# Altium PCB Mach trai tim.PcbDoc
Units mm, origin at the board's own origin, x right, y up, seen from the top; angles counter-clockwise.
Board outline 100 x 100 mm, 2 copper layers (Top Layer, Bottom Layer); 19 components, 17 nets, 59 pads, 0 vias.
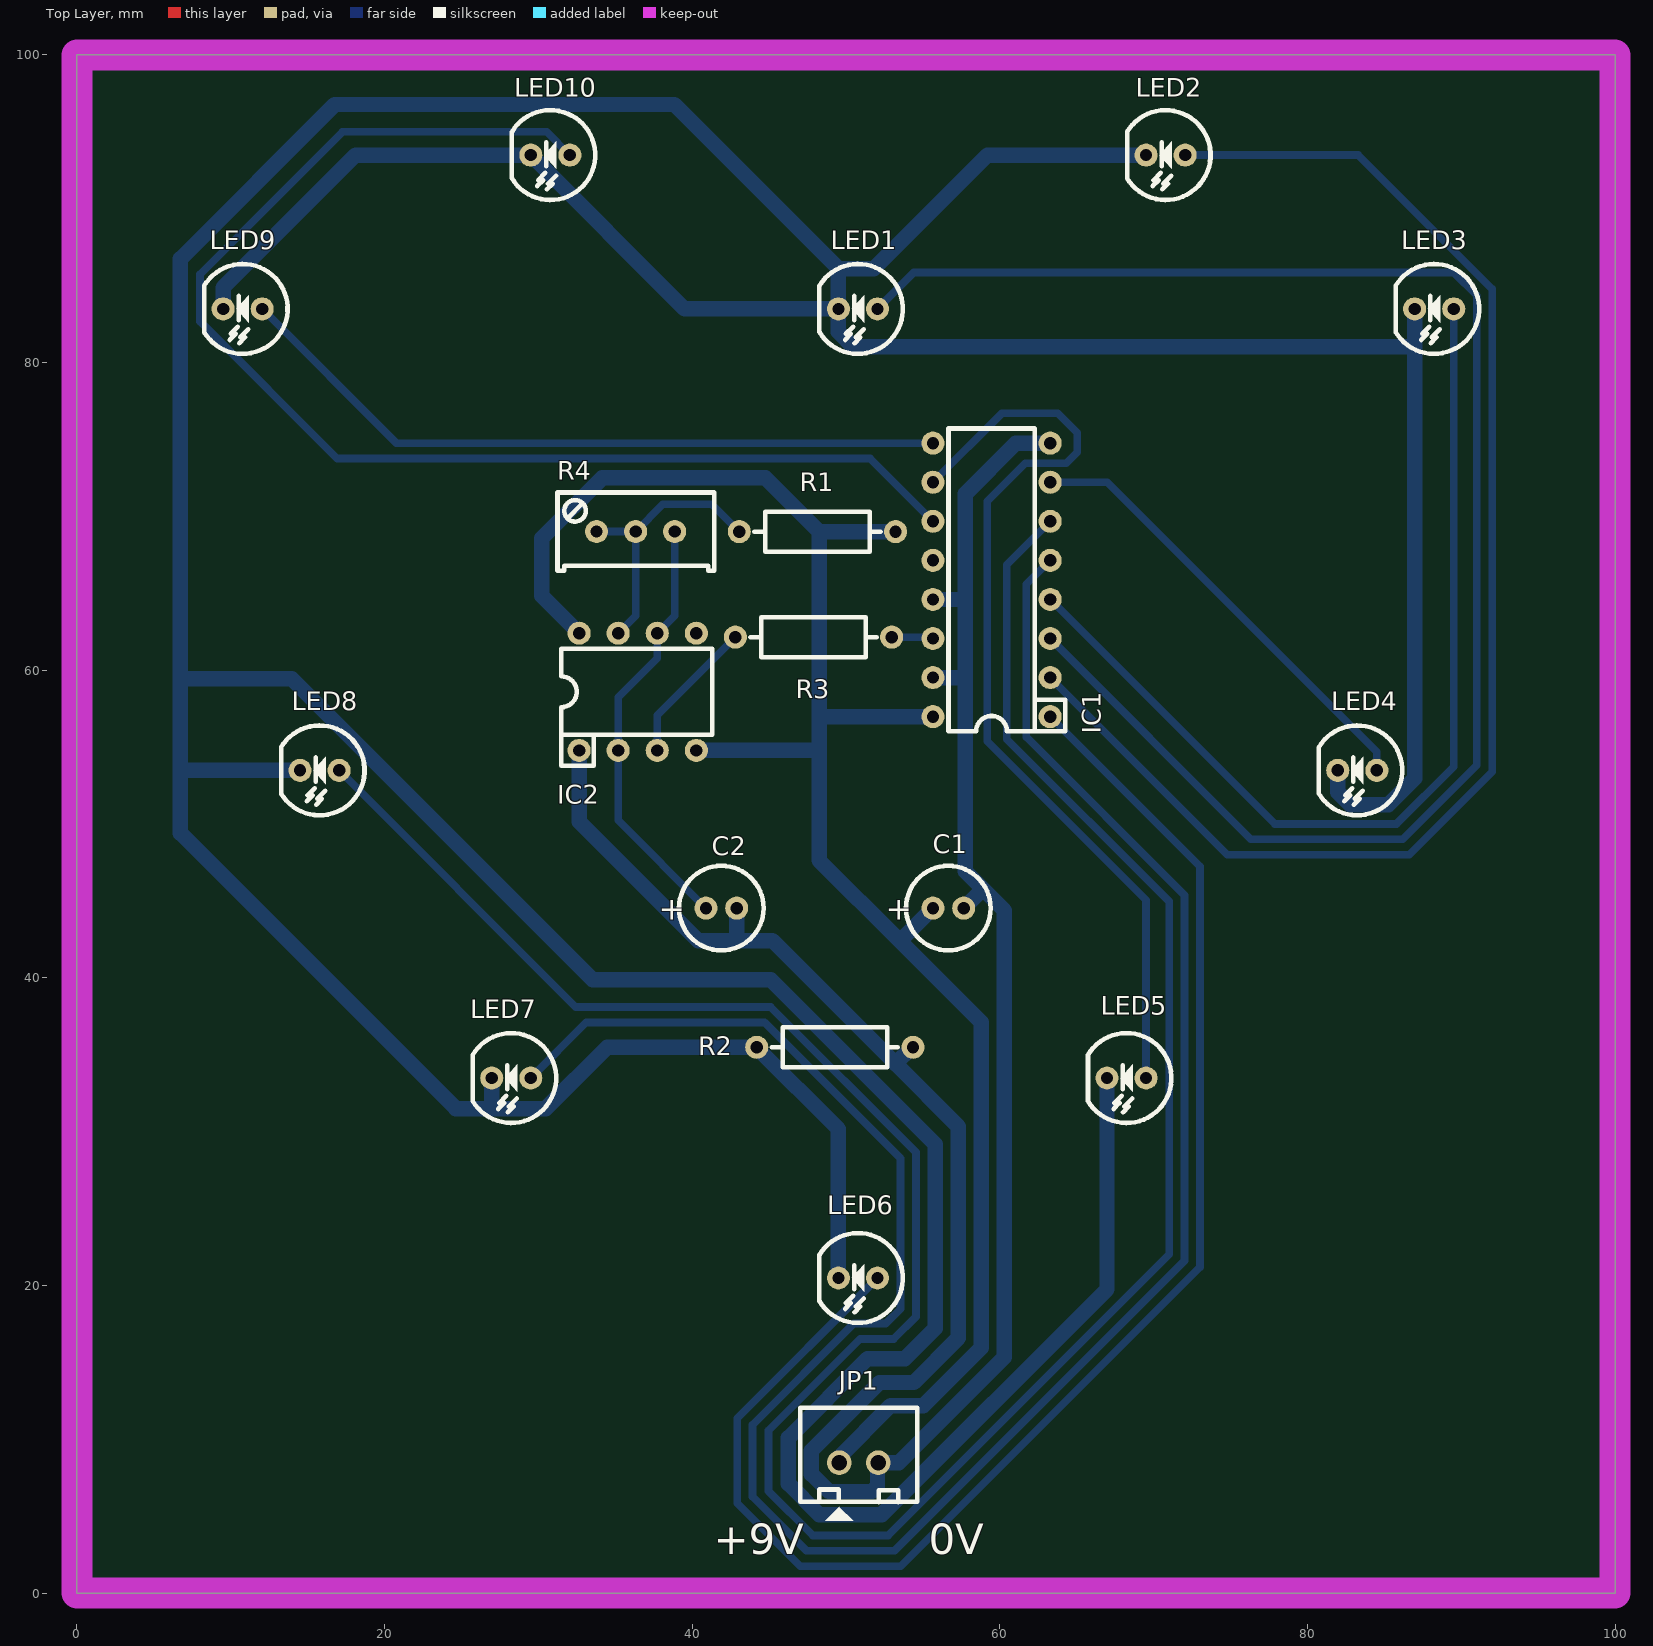
[diagram p0: Top Layer view]
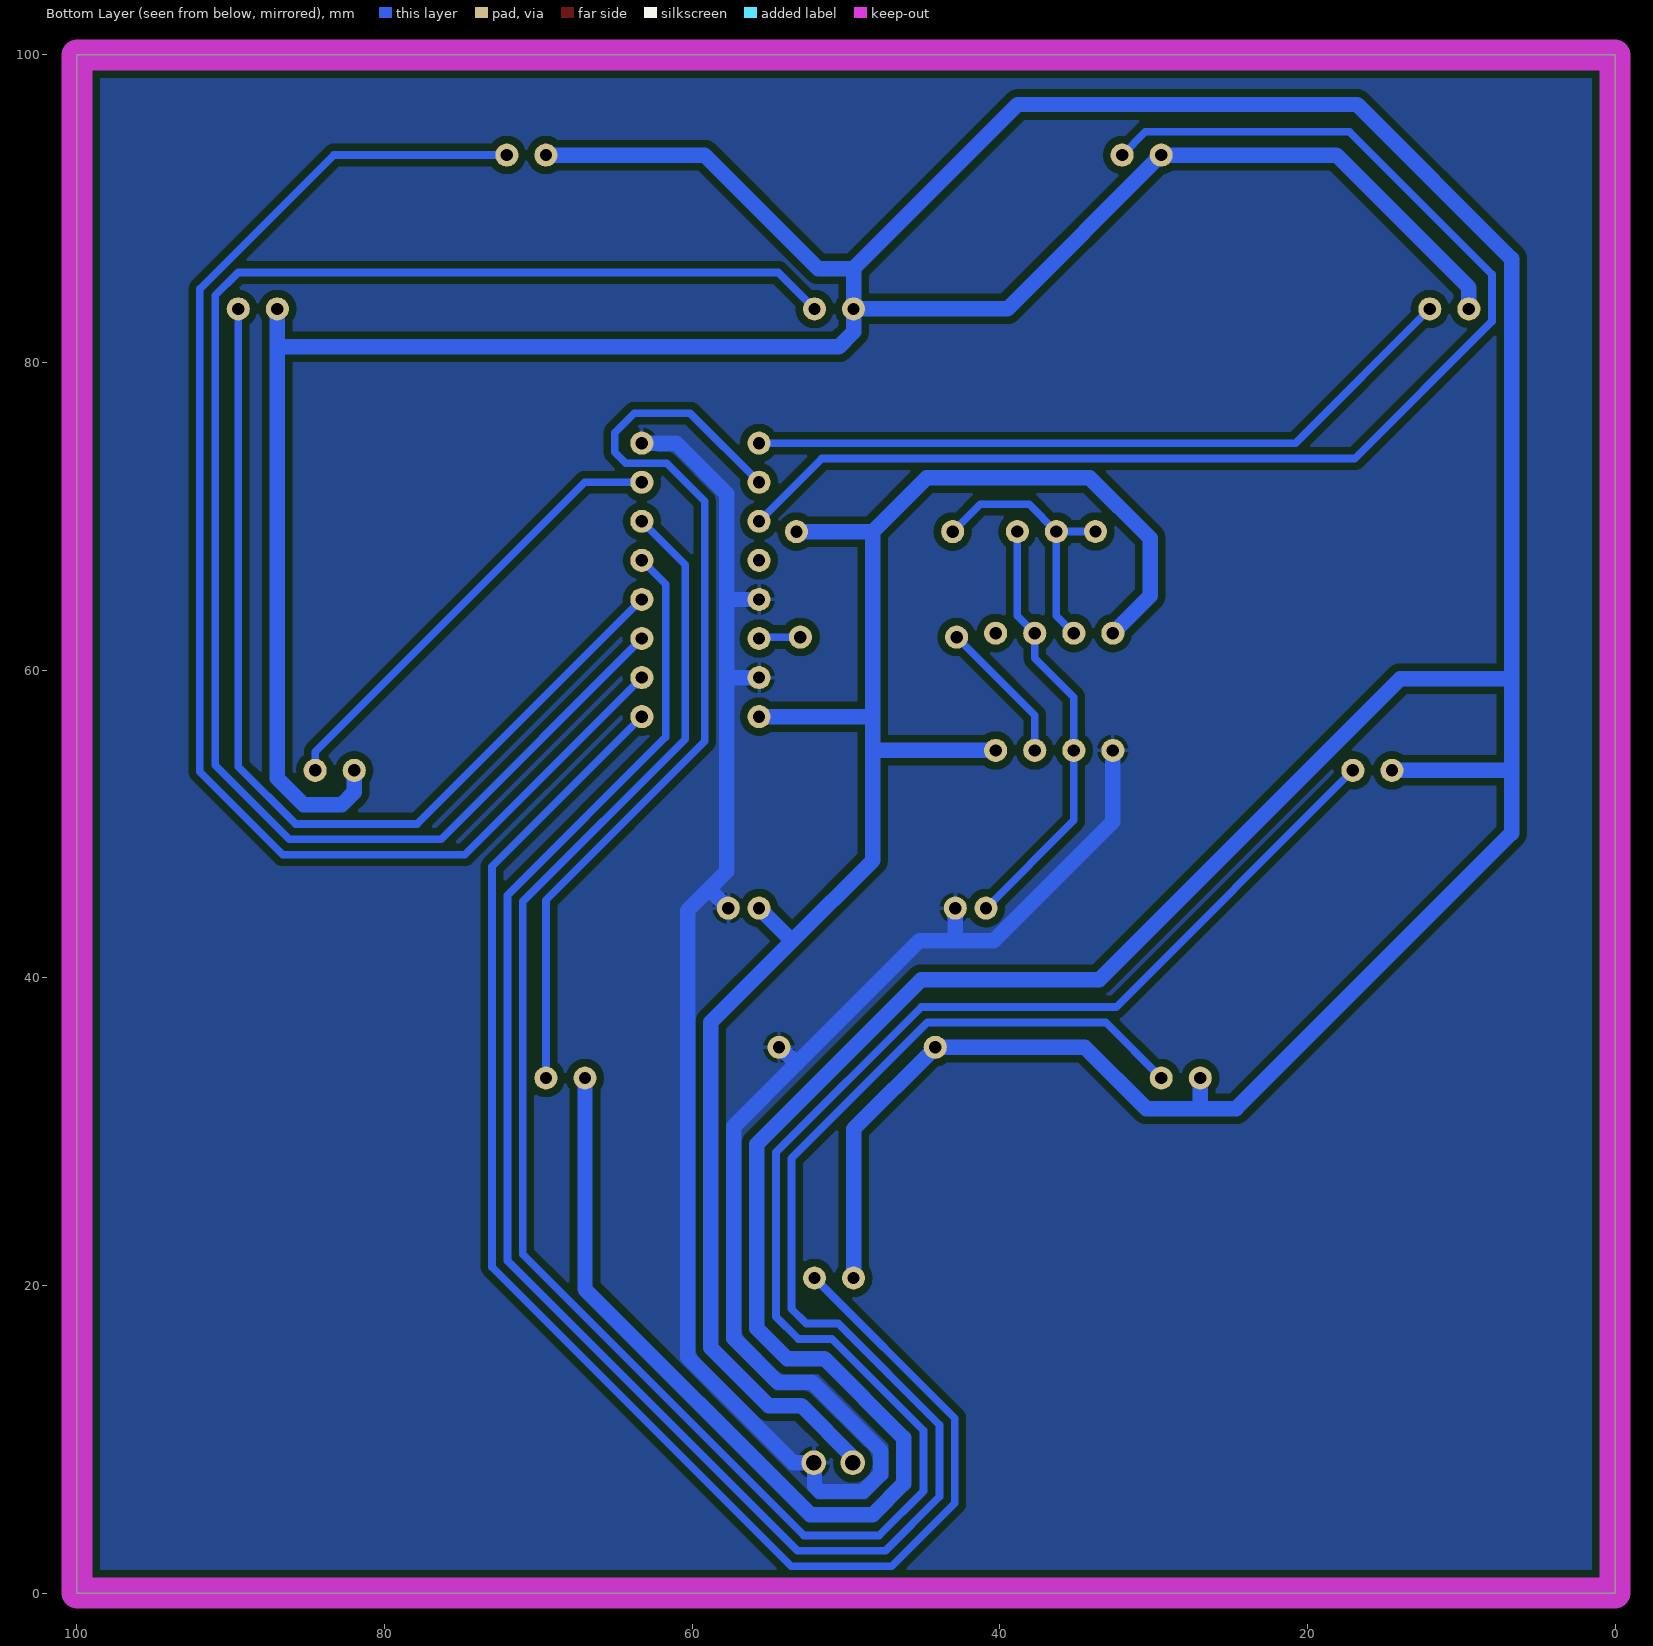
[diagram p1: Bottom Layer view, seen from below]
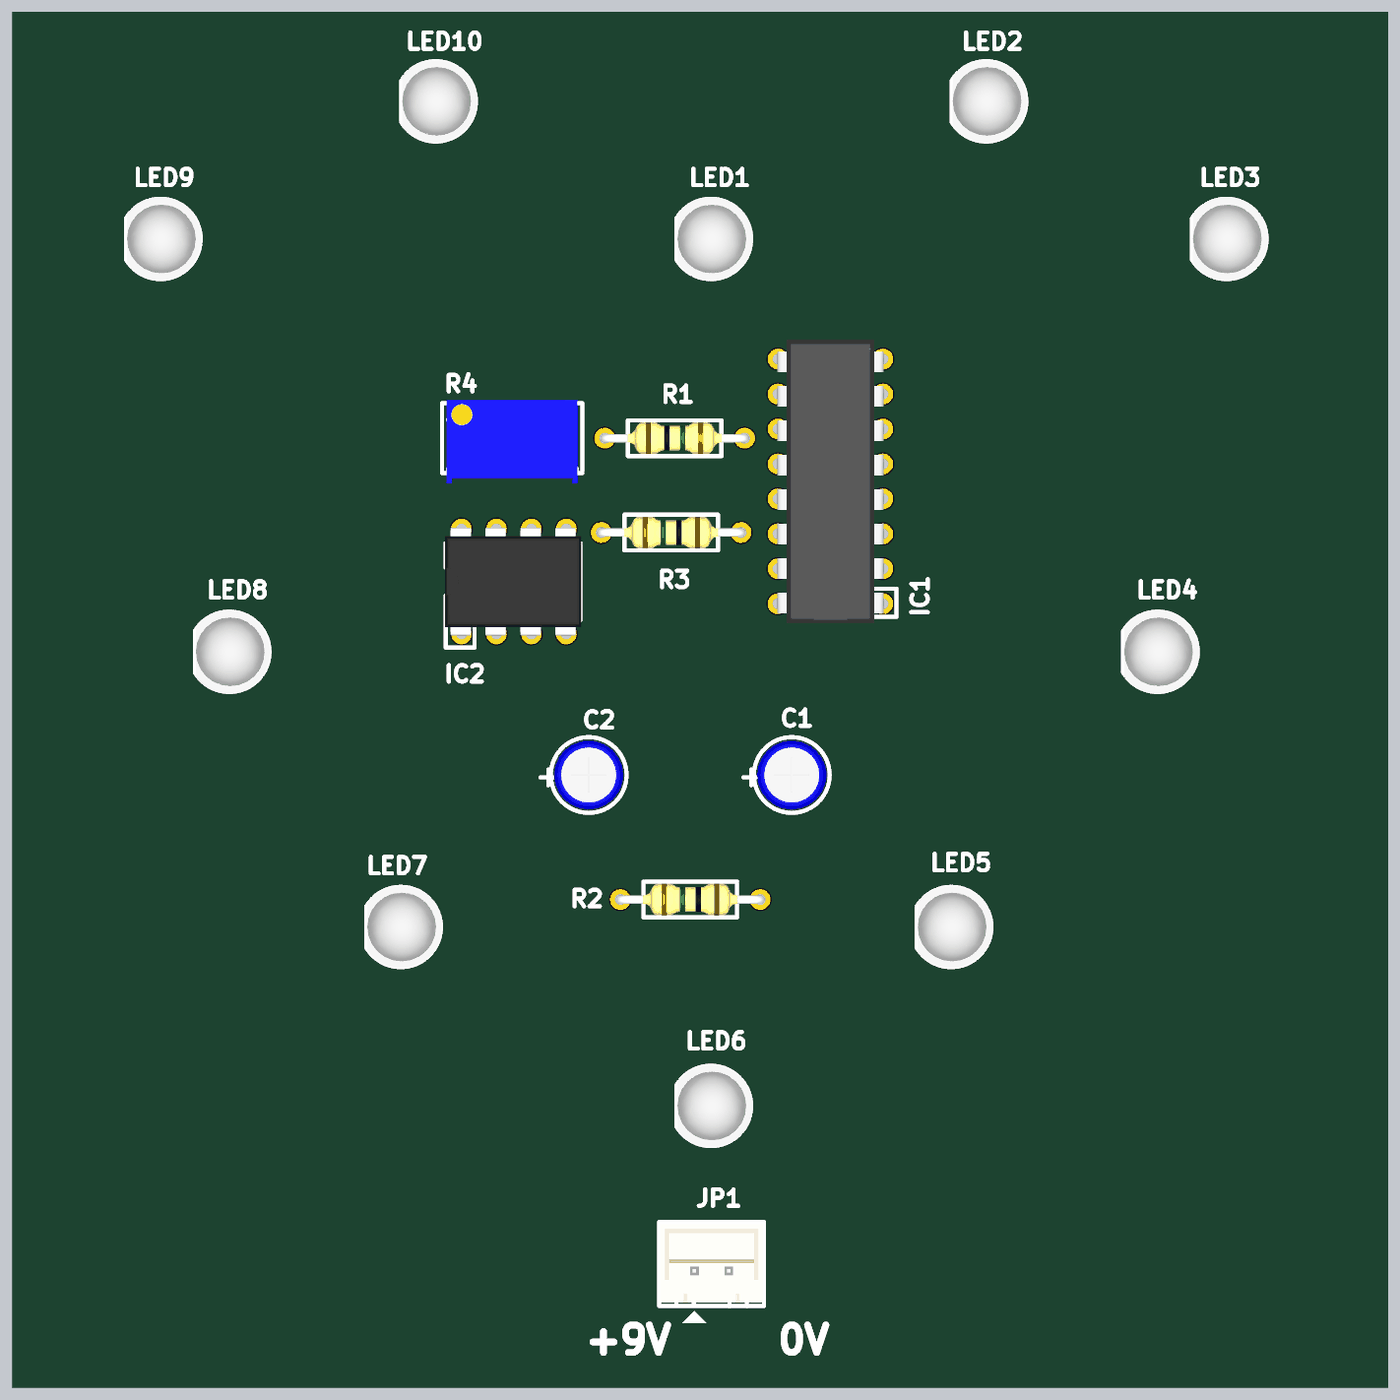
[diagram p2: 3D render of the assembled board from above, using the file's embedded part models]

## Layer stack, top to bottom
Top Solder: solder mask 0.0102, Solder Resist, Dk 3.5
Top Layer: signal copper 0.0356
Dielectric 1: dielectric 0.32, FR-4, Dk 4.8
Bottom Layer: signal copper 0.0356
Bottom Solder: solder mask 0.0102, Solder Resist, Dk 3.5

## Board outline
0,0 0,100 100,100 100,0

## Design rules (kind name [scope] priority, off if disabled: settings)
Clearance [All] p1: gap=0.5
PolygonConnect [All] p1: connectstyle=Relief reliefconductorwidth=0.254 reliefentries=4 polygonreliefangle="90 Angle" airgapwidth=0.254
RoutingVias [All] p1: holewidth=0.711 width=1.27 viastyle="Through Hole" minholewidth=0.711 minwidth=1.27 maxholewidth=0.711 maxwidth=1.27
SolderMaskExpansion [All] p1: expansion=0.102
Width Width_Power [InNetClass('Power_NET')] p1: maxlimit=1 minlimit=1 preferedwidth=1
Width Width_Signal [All] p2: maxlimit=0.5 minlimit=0.5 preferedwidth=0.5
30 further rules are at their usual default settings.

## Classes and differential pairs
net class Power_NET: GND NetLED1_2 VCC

## Components (designator, comment, footprint, x,y, rotation, side; value= is the part's Value field where it differs from the comment)
C1 "GSR10M016-0511TAF" CAP_1UF_50V 55.652,44.532 r0 top
C2 "GSR10M016-0511TAF" CAP_1UF_50V 40.894,44.532 r0 top
IC1 "CD4017" 74HC4017 63.272,56.978 r90 top
IC2 "LM555" LM555 32.65,54.784 r0 top
JP1 "9VDC" CON2 50.826,8.486 r0 top
LED1 "LED_R_5" LED5R 52.048,83.486 r180 top
LED2 "LED_R_5" LED5R 72.048,93.486 r180 top
LED3 "LED_R_5" LED5R 89.508,83.486 r180 top
LED4 "LED_R_5" LED5R 84.508,53.486 r180 top
LED5 "LED_R_5" LED5R 69.508,33.486 r180 top
LED6 "LED_R_5" LED5R 52.048,20.486 r180 top
LED7 "LED_R_5" LED5R 29.508,33.486 r180 top
LED8 "LED_R_5" LED5R 17.048,53.486 r180 top
LED9 "LED_R_5" LED5R 12.048,83.486 r180 top
LED10 "LED_R_5" LED5R 32.048,93.486 r180 top
R1 "CF1/4W1KJ25" "RES 1/4W CFR25" 43.064,69.008 r0 top
R2 "CF1/4W1KJ25" "RES 1/4W CFR25" 54.356,35.484 r180 top
R3 "CF1/4W1KJ25" "RES 1/4W CFR25" 52.97,62.15 r180 top
R4 "100K" VR1 33.782,69.012 r0 top

## Footprints (in the part's own frame and the unit in brackets; to place one, negate y for a bottom-side part, rotate by r counter-clockwise, add the part's x,y. Pads: shape width x height; smd on the part's side, far side on the other; paste and mask are expansions set on the pad)
74HC4017 [mm] "DIP 16, 16 PIN, W 7.62, Pin to pin 2.54MM"
  round 1.5 hole 0.8: 1(0,0) 2(2.54,0) 3(5.08,0) 4(7.62,0) 5(10.16,0) 6(12.7,0) 7(15.24,0) 8(17.78,0) 9(17.78,7.62) 10(15.24,7.62) 11(12.7,7.62) 12(10.16,7.62) 13(7.62,7.62) 14(5.08,7.62) 15(2.54,7.62) 16(0,7.62)
  silkscreen extent -0.95,-0.99 18.73,6.61, body extent -1.41,-0.07 19.19,7.69, height 4.5
CAP_1UF_50V [mm] "Capacitor, Electrolytic, Radial; Body 5 x 11 mm (Dia.xH typ); Pin Spacing 2 mm (typ)"
  round 1.5 hole 0.8: 1(0,0) 2(2,0)
  silkscreen extent -1.75,-2.75 3.75,2.75, body extent -1.53,-2.53 3.53,2.53, height 11.53
CON2 [mm] "CON2"
  round 1.6 hole 1 mask+0.1: 1(-1.27,0) 2(1.27,0)
  silkscreen extent -3.81,-3.8 3.81,3.56, body extent -3.75,-2.29 3.75,3.41, height 7
LED5R [mm] "LED, RED, 2 LEAD, 5mm"
  round 1.5 hole 0.8: 1(0,0) 2(2.54,0)
  silkscreen extent -1.65,-2.92 3.77,2.92, body extent -1.71,-3.01 3.71,3.01, height 12.31
LM555 [mm] "DIP 8, 8 PIN, W 7.62, Pin to pin 2.54MM"
  round 1.5 hole 0.8: 1(0,0) 2(2.54,0) 3(5.08,0) 4(7.62,0) 5(7.62,7.62) 6(5.08,7.62) 7(2.54,7.62) 8(0,7.62)
  silkscreen extent -1.15,-0.99 8.65,6.61, body extent -1.2,-0.1 8.7,7.72, height 4.57
"RES 1/4W CFR25" [mm] "Axial Device, Thru-Hole; 2 Leads fi 0.55"
  round 1.5 hole 0.8 mask+0.1: 1(0,0) 2(10.16,0)
  silkscreen extent 0.98,-1.3 9.18,1.3, body extent -0.3,-1.16 10.47,1.16, height 2.93
VR1 [mm] "Variable Resistor"
  round 1.5 hole 0.8 mask+0.1: 1(0,0) 2(2.54,0) 3(5.08,0)
  silkscreen extent -2.54,-2.54 7.65,2.54, body extent -2.22,-3.3 7.3,2.79, height 11.56

## Part data
C1 C2: "CAP GSR 0511 10uF 16V 20%"
IC1: library part 4017, "Decade Counter/Divider with 10 Decoded Outputs"
IC2: "Timer"
JP1: library part Con2, "Connector 2"
LED1 LED2 LED3 LED4 LED5 LED6 LED7 LED8 LED9 LED10: library part LED_RED_5MM, "LED Red 5mm"
R1 R2 R3: "RES CF AXIAL-0.3 5% 1/4W 1K"
R4: library part VR2, "Var Resistor"

## Nets (pads, with @x,y where several pads share a name; then routed paths per layer and width w, separated by ;. In a path a pad name is that pad's centre, name@x,y a point inside that pad or via, vN(x,y) a via of type N, cw(c..) or ccw(c..) an arc to the next point about the centre after c; other vN are vias at no path point)
GND: C1.2 C2.2 IC1.8 IC1.13 IC1.15 IC2.1 JP1.2 R2.1 | length 156.5
  Bottom Layer w1: IC2.1 32.65,50.154 40.386,42.418 42.672,42.418 ; C2.2 42.894,42.64 42.672,42.418 ; JP1.2@52.048,8.486 52.048,6.95 51.702,6.604 48.882,6.604 47.752,7.734 47.752,9.264 52.18,13.692 54.407,13.692 57.298,16.583 57.298,30.332 53.213,34.417 ; JP1.2 53.444,8.486 60.298,15.34 60.298,44.378 58.898,45.778 ; R2.1 54.28,35.484 53.213,34.417 ; IC1.15 57.658,59.518 57.754,59.614 ; IC1.13 57.754,64.598 ; C1.2@57.754,44.634 58.898,45.778 ; IC1.8 61.042,74.758 57.754,71.47 57.754,64.598 ; 42.672,42.418 45.212,42.418 53.213,34.417 ; 57.754,59.614 57.754,46.922 58.898,45.778 ; 57.754,59.614 57.754,64.598
NetC2_1: C2.1 IC2.2 IC2.6 R4.3 | length 28.4
  Bottom Layer w0.5: R4.3 38.862,63.536 IC2.6 37.73,60.768 35.19,58.228 IC2.2 35.19,50.236 C2.1
NetIC1_1: IC1.1 LED6.1 | length 98.1
  Bottom Layer w0.5: LED6.1 42.926,11.364 42.926,5.842 47.018,1.75 53.566,1.75 73.008,21.192 73.008,47.242 IC1.1
NetIC1_2: IC1.2 LED2.1 | length 90.7
  Bottom Layer w0.5: IC1.2 74.784,48.006 86.614,48.006 92.008,53.4 92.008,84.776 83.298,93.486 LED2.1
NetIC1_3: IC1.3 LED1.1 | length 106.2
  Bottom Layer w0.5: LED1.1 54.414,85.852 89.518,85.852 91.008,84.362 91.008,53.814 86.2,49.006 76.324,49.006 IC1.3
NetIC1_4: IC1.4 LED3.1 | length 63.6
  Bottom Layer w0.5: IC1.4 77.864,50.006 85.786,50.006 89.508,53.728 LED3.1
NetIC1_5: IC1.5 LED7.1 | length 144.2
  Bottom Layer w0.5: LED7.1 33.122,37.1 44.701,37.1 53.548,28.253 53.548,18.496 52.578,17.526 50.502,17.526 43.926,10.95 43.926,6.256 47.432,2.75 53.152,2.75 72.008,21.606 72.008,45.374 61.722,55.66 61.722,65.588 IC1.5
NetIC1_6: IC1.6 LED8.1 | length 163.1
  Bottom Layer w0.5: LED8.1 32.434,38.1 45.116,38.1 54.548,28.668 54.548,17.972 53.102,16.526 50.916,16.526 44.958,10.568 44.958,6.638 47.846,3.75 52.738,3.75 71.008,22.02 71.008,44.96 60.452,55.516 60.452,66.858 IC1.6
NetIC1_7: IC1.7 LED4.1 | length 29.7
  Bottom Layer w0.5: IC1.7 66.974,72.218 84.508,54.684 LED4.1
NetIC1_9: IC1.9 LED9.1 | length 47.2
  Bottom Layer w0.5: LED9.1 20.776,74.758 IC1.9
NetIC1_10: IC1.10 LED5.1 | length 62
  Bottom Layer w0.5: IC1.10 60.142,76.708 63.754,76.708 65.024,75.438 65.024,74.168 64.314,73.458 61.658,73.458 59.182,70.982 59.182,55.372 69.508,45.046 LED5.1
NetIC1_11: IC1.11 LED10.1 | length 84.6
  Bottom Layer w0.5: LED10.1 30.538,94.996 17.272,94.996 8.008,85.732 8.008,82.67 16.92,73.758 51.572,73.758 IC1.11
NetIC1_14: IC1.14 R3.1 | length 2.7
  Bottom Layer w0.5: R3.1 55.56,62.15 IC1.14
NetIC2_3: IC2.3 R3.2 | length 9.5
  Bottom Layer w0.5: IC2.3 37.73,57.07 R3.2
NetIC2_7: IC2.7 R1.1 R4.1 R4.2 | length 17.8
  Bottom Layer w0.5: R4.1 R4.2 ; IC2.7 36.322,63.536 R4.2 ; R1.1 41.282,70.79 38.1,70.79 R4.2
NetLED1_2: LED1.2 LED2.2 LED3.2 LED4.2 LED5.2 LED6.2 LED7.2 LED8.2 LED9.2 LED10.2 R2.2 | length 444.8
  Bottom Layer w1: LED9.2 9.508,84.87 18.124,93.486 LED10.2 39.508,83.486 LED1.2 ; LED8.2 6.731,53.486 ; LED7.2 26.968,31.706 27.178,31.496 ; LED6.2 49.508,30.172 R2.2 34.468,35.484 30.48,31.496 27.178,31.496 ; LED5.2 66.968,19.748 52.324,5.104 48.26,5.104 46.252,7.112 46.252,10.094 51.398,15.24 53.834,15.24 55.798,17.204 55.798,29.185 45.105,39.878 33.528,39.878 13.97,59.436 6.731,59.436 ; LED2.2 59.196,93.486 51.816,86.106 49.508,86.106 ; LED4.2 81.968,52.068 82.78,51.256 85.268,51.256 86.968,52.956 86.968,81.026 ; LED3.2 86.968,81.026 ; 6.731,53.486 6.731,49.403 24.638,31.496 27.178,31.496 ; 6.731,53.486 6.731,59.436 ; 6.731,59.436 6.731,86.741 16.764,96.774 38.84,96.774 49.508,86.106 ; LED1.2 49.508,86.106 ; LED1.2 49.508,81.988 50.47,81.026 86.968,81.026
VCC: C1.1 IC1.16 IC2.4 IC2.8 JP1.1 R1.2 | length 121.8
  Bottom Layer w1: IC2.8 30.226,64.828 30.226,68.58 34.154,72.508 44.764,72.508 48.26,69.012 ; IC2.4 48.01,54.784 48.26,54.534 ; JP1.1@49.508,8.486 49.508,8.792 52.908,12.192 55.029,12.192 58.798,15.961 58.798,37.102 53.478,42.422 ; R1.2 48.264,69.008 48.26,69.012 ; C1.1 53.542,42.422 53.478,42.422 ; IC1.16 48.418,56.978 48.26,56.82 ; 48.26,54.534 48.26,56.82 ; 48.26,54.534 48.26,47.64 53.478,42.422 ; 48.26,56.82 48.26,69.012
pads on no net: IC1.12 IC2.5

## Polygon pours and split planes (outlines as drawn)
GND on Bottom Layer "Bottom Layer-No Net" (solid, pour order 2): 0,0.508 0,100 100,100 100,0 0.254,0

## Keep-outs
Keep-Out Layer:
  the board outline again, w2

## Silkscreen, mask and mechanical layers (free items; w line width, h text height)
Top Overlay:
  text "+9V" at 41.402,2.54 h2
  text "0V" at 55.372,2.54 h2

## Dimensions
0,100 to 0,0 on Mechanical 10
0,100 to 100,100 on Mechanical 10

## Text inside footprints (layer, text, board x,y; h text height)
C1: Top Overlay "+" at 52.588,43.77 h1.5; Mechanical 1 "+" at 54.152,44.032 h1; Mechanical 1 "1" at 55.452,44.032 h1; Mechanical 1 "2" at 57.352,44.032 h1
C2: Top Overlay "+" at 37.83,43.77 h1.5; Mechanical 1 "+" at 39.394,44.032 h1; Mechanical 1 "1" at 40.694,44.032 h1; Mechanical 1 "2" at 42.594,44.032 h1
IC1: Mechanical 1 "1" at 62.362,56.728 h1 r90; Mechanical 1 "8" at 62.402,74.278 h1 r90; Mechanical 1 "9" at 57.582,74.438 h1 r90; Mechanical 1 "16" at 57.462,56.628 h1 r90
IC2: Mechanical 1 "8" at 32.3,60.594 h1; Mechanical 1 "5" at 39.9,60.594 h1; Mechanical 1 "4" at 39.9,55.694 h1; Mechanical 1 "1" at 32.4,55.694 h1
JP1: Mechanical 1 "1" at 49.426,7.986 h1; Mechanical 1 "2" at 51.826,7.986 h1; Mechanical 1 "CN?" at 50.826,8.486 h0.8
R1: Mechanical 1 "R?" at 43.144,69.008 h0.5
R2: Mechanical 1 "R?" at 54.276,35.484 h0.5 r180
R3: Mechanical 1 "R?" at 52.89,62.15 h0.5 r180
R4: Mechanical 1 "3" at 38.552,68.502 h1; Mechanical 1 "2" at 36.022,68.482 h1; Mechanical 1 "1" at 33.642,68.522 h1